# Altium PCB PCB-IO-PROTECTION-3.PcbDoc
Units mm, origin at the board's own origin, x right, y up, seen from the top; angles counter-clockwise.
Board outline 40 x 50 mm, 2 copper layers (Top Layer, Bottom Layer); 6 components, 13 nets, 30 pads, 8 vias.
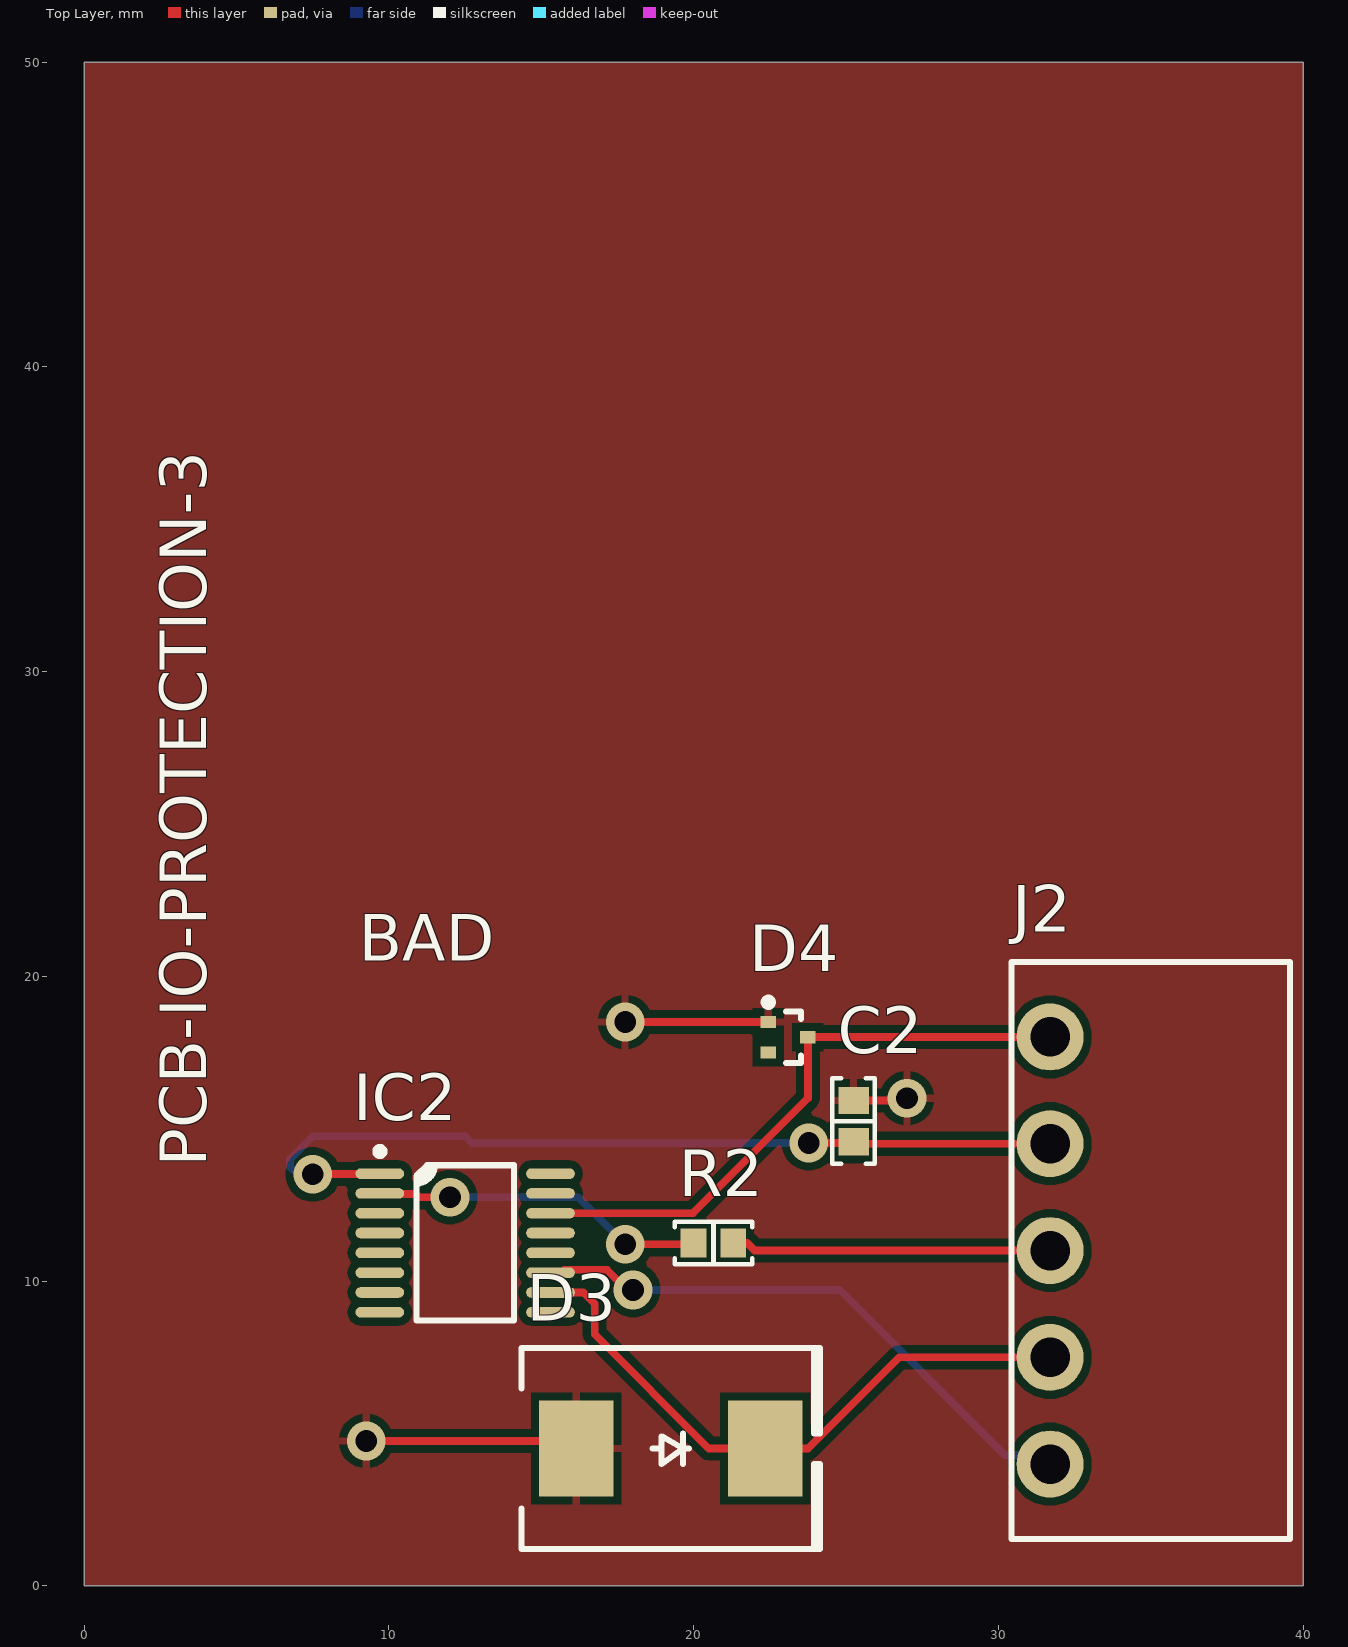
[diagram p0: Top Layer view]
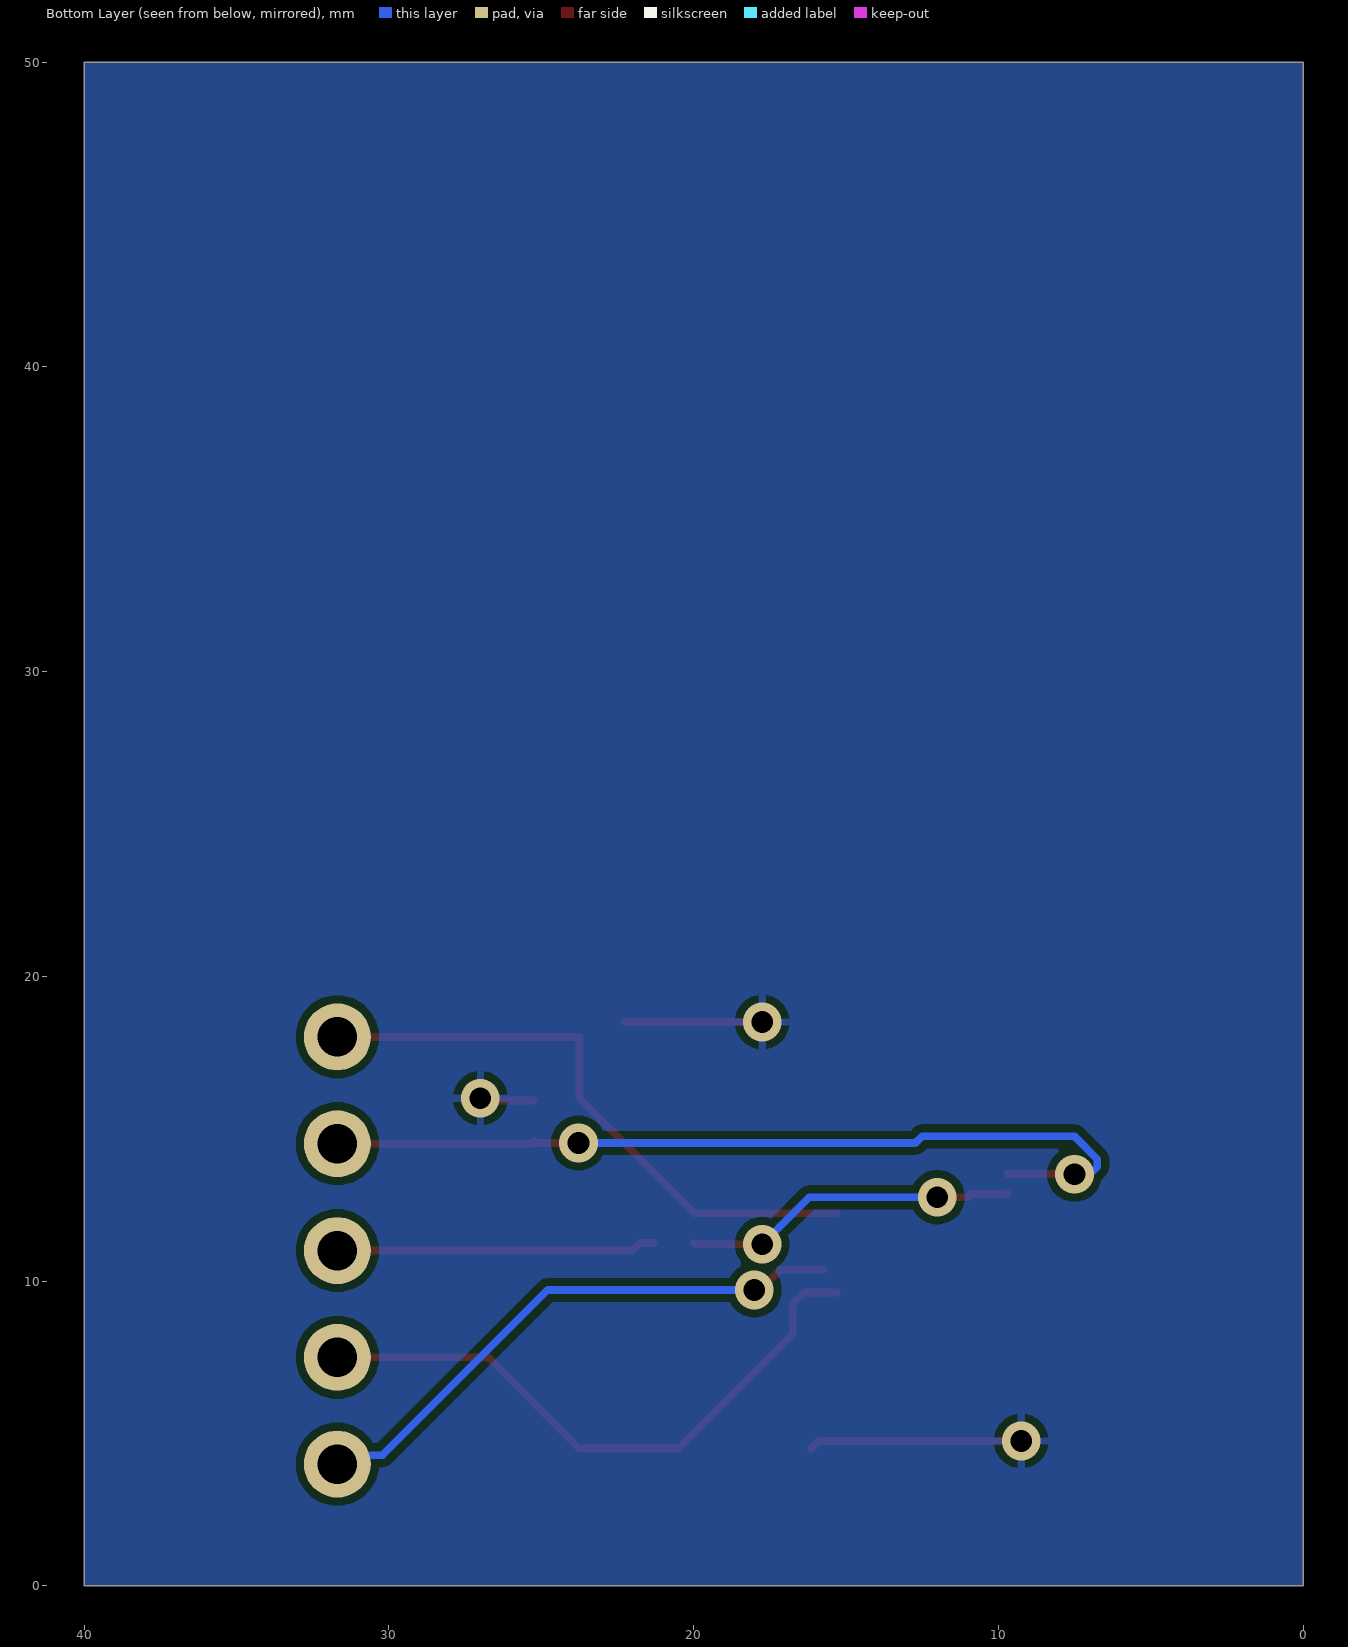
[diagram p1: Bottom Layer view, seen from below]
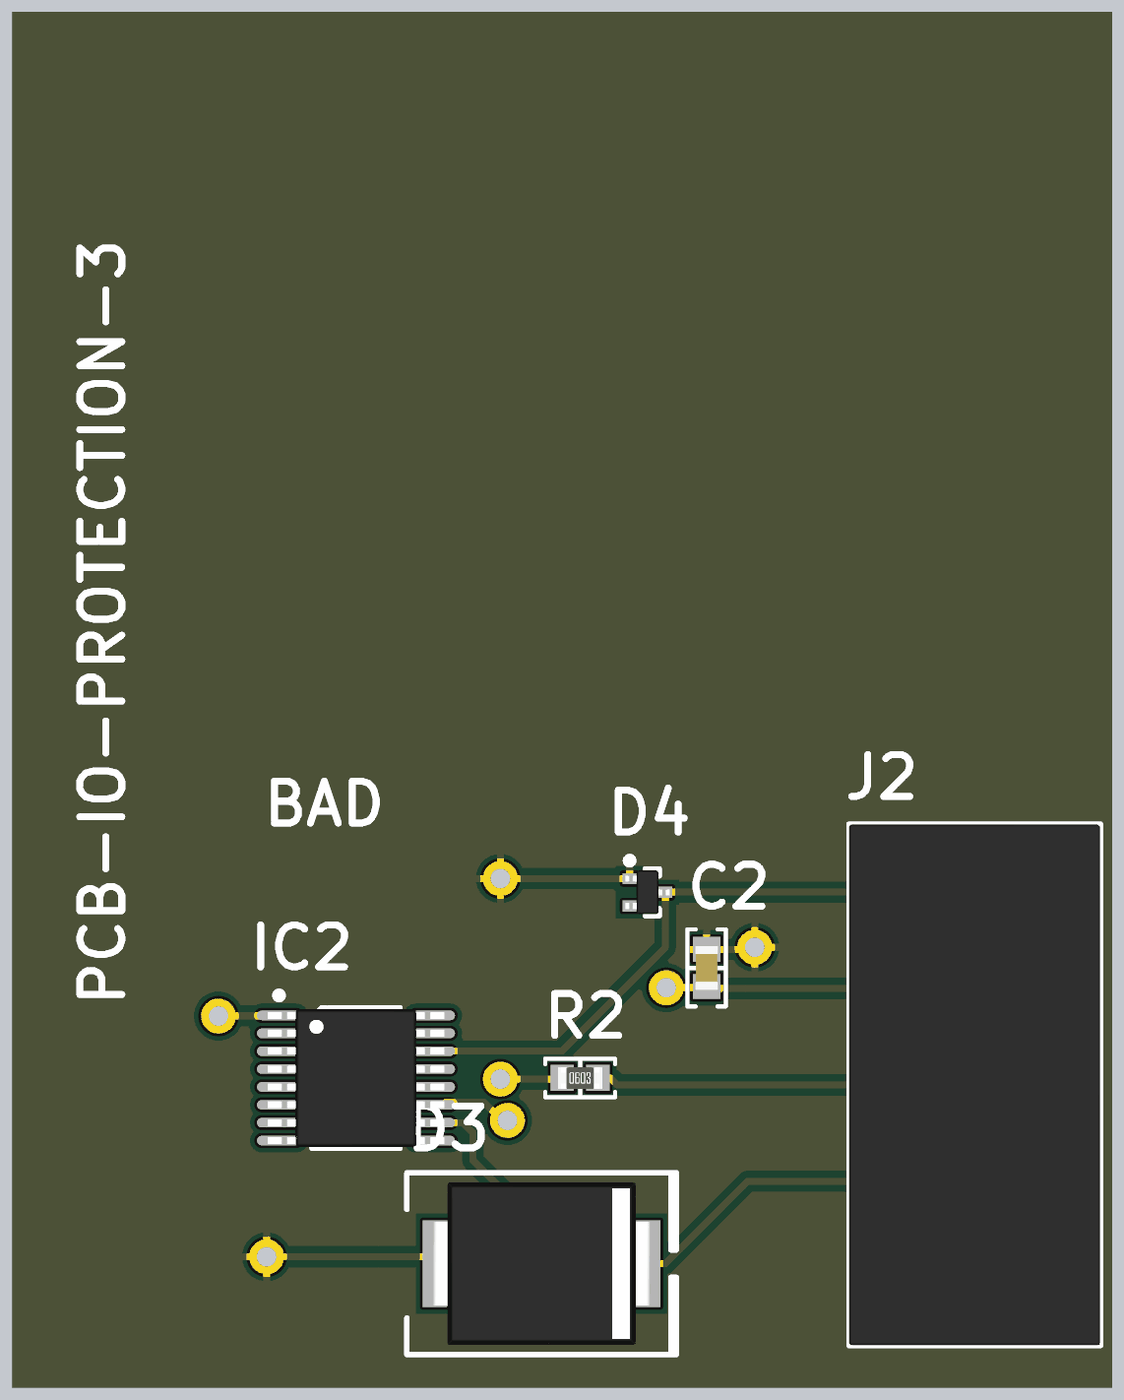
[diagram p2: 3D render of the assembled board from above, using the file's embedded part models]

## Layer stack, top to bottom
Top Solder: solder mask 0.0102, Solder Resist, Dk 3.5
Top Layer: signal copper 0.0356
Dielectric 1: dielectric 0.32, FR-4, Dk 4.8
Bottom Layer: signal copper 0.0356
Bottom Solder: solder mask 0.0102, Solder Resist, Dk 3.5

## Board outline
0,0 40,0 40,50 0,50

## Design rules (kind name [scope] priority, off if disabled: settings)
Clearance [All] p1: gap=0.254 ignorepadtopadclearanceinfootprint=FALSE except(0: Arc-Hole Track-Hole SMDPad-Hole THPad-Hole Via-Hole Fill-Hole Poly-Hole Region-Hole Text-Hole)
PolygonConnect [All] p1: connectstyle=Relief reliefconductorwidth=0.254 reliefentries=4 polygonreliefangle="90 Angle" airgapwidth=0.254
RoutingVias [All] p1: holewidth=0.711 width=1.27 viastyle="Through Hole" minholewidth=0.711 minwidth=1.27 maxholewidth=0.711 maxwidth=1.27
SolderMaskExpansion [All] p1: expansion=0.102 istentingtop=FALSE
Width [All] p1: maxlimit=0.254 minlimit=0.254 preferedwidth=0.254
30 further rules are at their usual default settings.

## Components (designator, comment, footprint, x,y, rotation, side; value= is the part's Value field where it differs from the comment)
C2 "1 µF" "CAP 0603_1608" 25.25,15.25 r270 top
D3 "5.0SMDJ130CA" "DO214AB SMC" 19.25,4.5 r0 top
D4 "BZX84C6V8T-7-F" "DIODES SOT-523" 23.1,18 r0 top
IC2 "ADS1120IPWR" "TI TSSOP-16 PW" 12.5,11.25 r0 top
J2 "0395021005" "MOLEX 395021005" 35,11 r270 top
R2 "360 Ohms" "RES 0603_1608" 20.65,11.25 r0 top

## Footprints (in the part's own frame and the unit in brackets; to place one, negate y for a bottom-side part, rotate by r counter-clockwise, add the part's x,y. Pads: shape width x height; smd on the part's side, far side on the other; paste and mask are expansions set on the pad)
"CAP 0603_1608" [mm] "Chip Capacitor, 2-Leads, Body 1.60x0.80mm, IPC Medium Density"
  rect 0.9x1 smd: 1(-0.675,0) 2(0.675,0)
  silkscreen extent -1.4,-0.7 1.4,0.7, body extent -0.8,-0.41 0.8,0.41, height 0.82
"DIODES SOT-523" [mm] "SOT523, 3-Leads, Body 0.8x1.60mm, Pitch 0.50mm, IPC Medium Density"
  rect 0.51x0.4 smd: 1(-0.65,0.5) 2(0.65,0) 3(-0.65,-0.5)
  silkscreen extent -0.77,-0.85 0.42,1.27, body extent -0.81,-0.8 0.81,0.8, height 0.82
"DO214AB SMC" [mm] "Molded Diode, 2-Leads, Body 6.85x5.90mm, IPC Medium Density"
  rect 2.45x3.15 smd: 1(-3.1,0) 2(3.1,0)
  silkscreen extent -4.9,-3.3 4.9,3.3, body extent -3.97,-2.95 3.97,2.95, height 2.6
"MOLEX 395021005" [mm] "5 Position Terminal Block Header, Male Pins, 3.5mm Pitch,18.95mmx9.2mm Body, 90°, Right Angle, THT"
  round 2.2 hole 1.295: 1(-7.011,-3.302) 2(-3.506,-3.302) 3(0,-3.302) 4(3.505,-3.302) 5(7.01,-3.302)
  silkscreen extent -9.47,-4.57 9.47,4.57, body extent -9.47,-4.57 9.47,4.57, height 7.11
"RES 0603_1608" [mm] "Chip Resistor, 2-Leads, Body 1.60x0.80mm, IPC Medium Density"
  rect 0.85x0.95 smd: 1(-0.65,0) 2(0.65,0)
  silkscreen extent -1.27,-0.7 1.27,0.7, body extent -0.8,-0.4 0.8,0.4, height 0.45
"TI TSSOP-16 PW" [mm] "TSSOP, 16-Leads, Body 5.00x4.40mm, Pitch 0.65mm, IPC Medium Density"
  oval 1.6x0.35 smd: 1(-2.8,2.275) 2(-2.8,1.625) 3(-2.8,0.975) 4(-2.8,0.325) 5(-2.8,-0.325) 6(-2.8,-0.975) 7(-2.8,-1.625) 8(-2.8,-2.275) 9(2.8,-2.275) 10(2.8,-1.625) 11(2.8,-0.975) 12(2.8,-0.325) 13(2.8,0.325) 14(2.8,0.975) 15(2.8,1.625) 16(2.8,2.275)
  silkscreen extent -2.92,-2.55 1.6,3.12, body extent -3.21,-2.5 3.21,2.5, height 1.2

## Part data
C2: library part C0603C105K4RACAUTO, "CAP CER 1UF 16V X7R 0603", Part Number=C0603C105K4RACAUTO
D3: "TVS DIODE 130VWM 209VC DO214AB", Part Number=5.0SMDJ130CA
D4: "DIODE ZENER 6.8V 150MW SOT523", Part Number=BZX84C6V8T-7-F
IC2: "IC ADC 16BIT SIGMA-DELTA 16TSSOP", Part Number=ADS1120IPWR
J2: "TERM BLOCK HDR 5POS 90DEG 3.5MM", Part Number=0395021005
R2: library part ERJ-PB3B3600V, "RES SMD 360 OHM 0.1% 1/5W 0603", Part Number=ERJ-PB3B3600V

## Via types
v1: diameter 1.27, hole 0.711, Top Layer to Bottom Layer, 8 vias

## Nets (pads, with @x,y where several pads share a name; then routed paths per layer and width w, separated by ;. In a path a pad name is that pad's centre, name@x,y a point inside that pad or via, vN(x,y) a via of type N, cw(c..) or ccw(c..) an arc to the next point about the centre after c; other vN are vias at no path point)
GND: C2.1 D3.1 D4.1 | length 13.3
  Top Layer w0.254: v1(9.25,4.75) 15.9,4.75 D3.1 ; v1(17.75,18.5) D4.1@22.25,18.5 ; C2.1 26.925,15.925 v1(27,16)
NetIC1_2: 
NetIC2_2: IC2.2 R2.1 | length 11
  Top Layer w0.254: IC2.2 9.718,12.857 10.877,12.857 10.984,12.75 v1(12,12.75) ; v1(17.75,11.209) 19.959,11.209 R2.1
  Bottom Layer w0.254: v1(12,12.75) 16.209,12.75 v1(17.75,11.209)
NOPROTECTION_BAD: 
NOPROTECTION_GOOD: IC2.11 J2.5 | length 18.6
  Top Layer w0.254: IC2.11@15.75,10.369 17.153,10.369 17.815,9.707 v1(18.007,9.707)
  Bottom Layer w0.254: v1(18.007,9.707) 24.793,9.707 30.217,4.283 31.405,4.283 J2.5
PROTECTION_CAP_BAD: 
PROTECTION_CAP_GOOD: C2.2 IC2.1 J2.2 | length 28.7
  Top Layer w0.254: v1(7.5,13.5) 7.512,13.513 9.688,13.513 IC2.1 ; v1(23.782,14.532) 25.207,14.532 C2.2 25.319,14.506 J2.2
  Bottom Layer w0.254: v1(7.5,13.5) 7,13.5 6.75,13.75 6.75,14 7.5,14.75 12.5,14.75 12.718,14.532 v1(23.782,14.532)
PROTECTION_DIODE_BAD: 
PROTECTION_DIODE_GOOD: D4.2 IC2.14 J2.1 | length 20
  Top Layer w0.254: IC2.14 19.975,12.225 23.75,16 D4.2 ; D4.2@23.75,18.005 31.693,18.005 J2.1
PROTECTION_RES_BAD: 
PROTECTION_RES_GOOD: J2.3 R2.2 | length 10.5
  Top Layer w0.254: R2.2 21.75,11.25 22,11 J2.3
PROTECTION_TVS_BAD: 
PROTECTION_TVS_GOOD: D3.2 IC2.10 J2.4 | length 20.3
  Top Layer w0.254: IC2.10 16.375,9.625 16.75,9.25 16.75,8.25 20.5,4.5 D3.2 23.75,4.5 26.745,7.495 J2.4
pads on no net: D4.3 IC2.3 IC2.4 IC2.5 IC2.6 IC2.7 IC2.8 IC2.9 IC2.12 IC2.13 IC2.15 IC2.16

## Polygon pours and split planes (outlines as drawn)
GND on Top Layer "TOP_GND" (solid, pour order 2): 0,0 40,0 40,50 0,50
GND on Bottom Layer "BOT_GND" (solid, pour order 3): 0,0 40,0 40,50 0,50

## Silkscreen, mask and mechanical layers (free items; w line width, h text height)
Top Overlay:
  text "BAD" at 9.004,20.504 h1.52
  text "PCB-IO-PROTECTION-3" at 3.996,13.754 h1.52 r90
Mechanical 1:
  the board outline again, w0.254